# EAGLE board TapuinoMini (EAGLE 7.6.0)
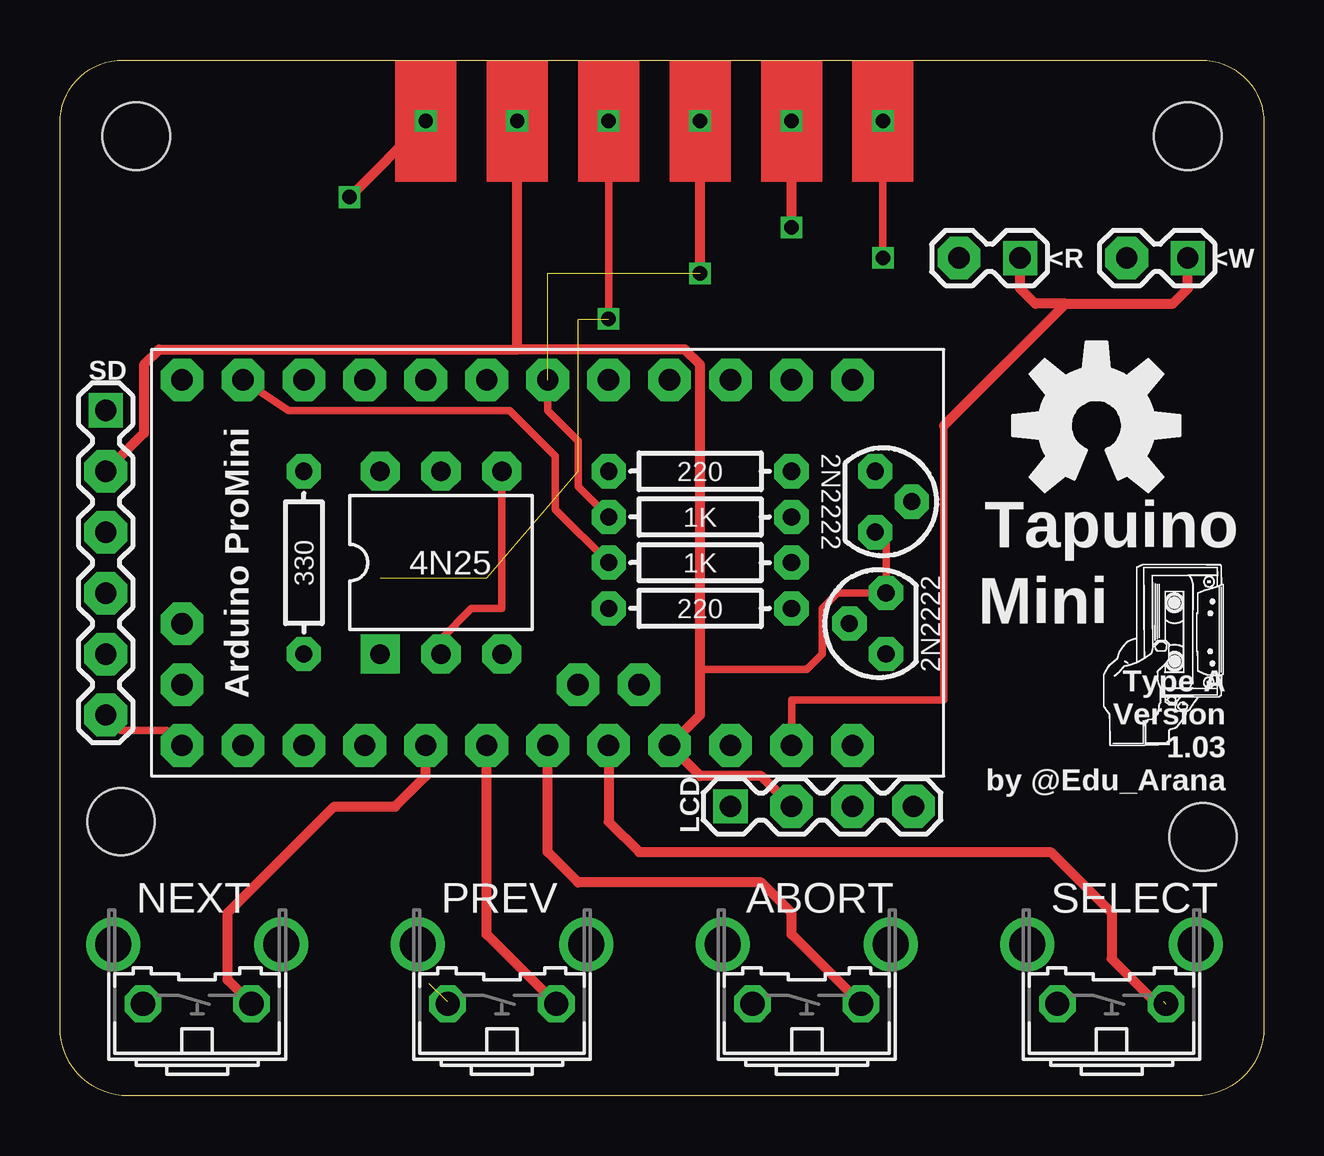
[diagram p0: board, top side]
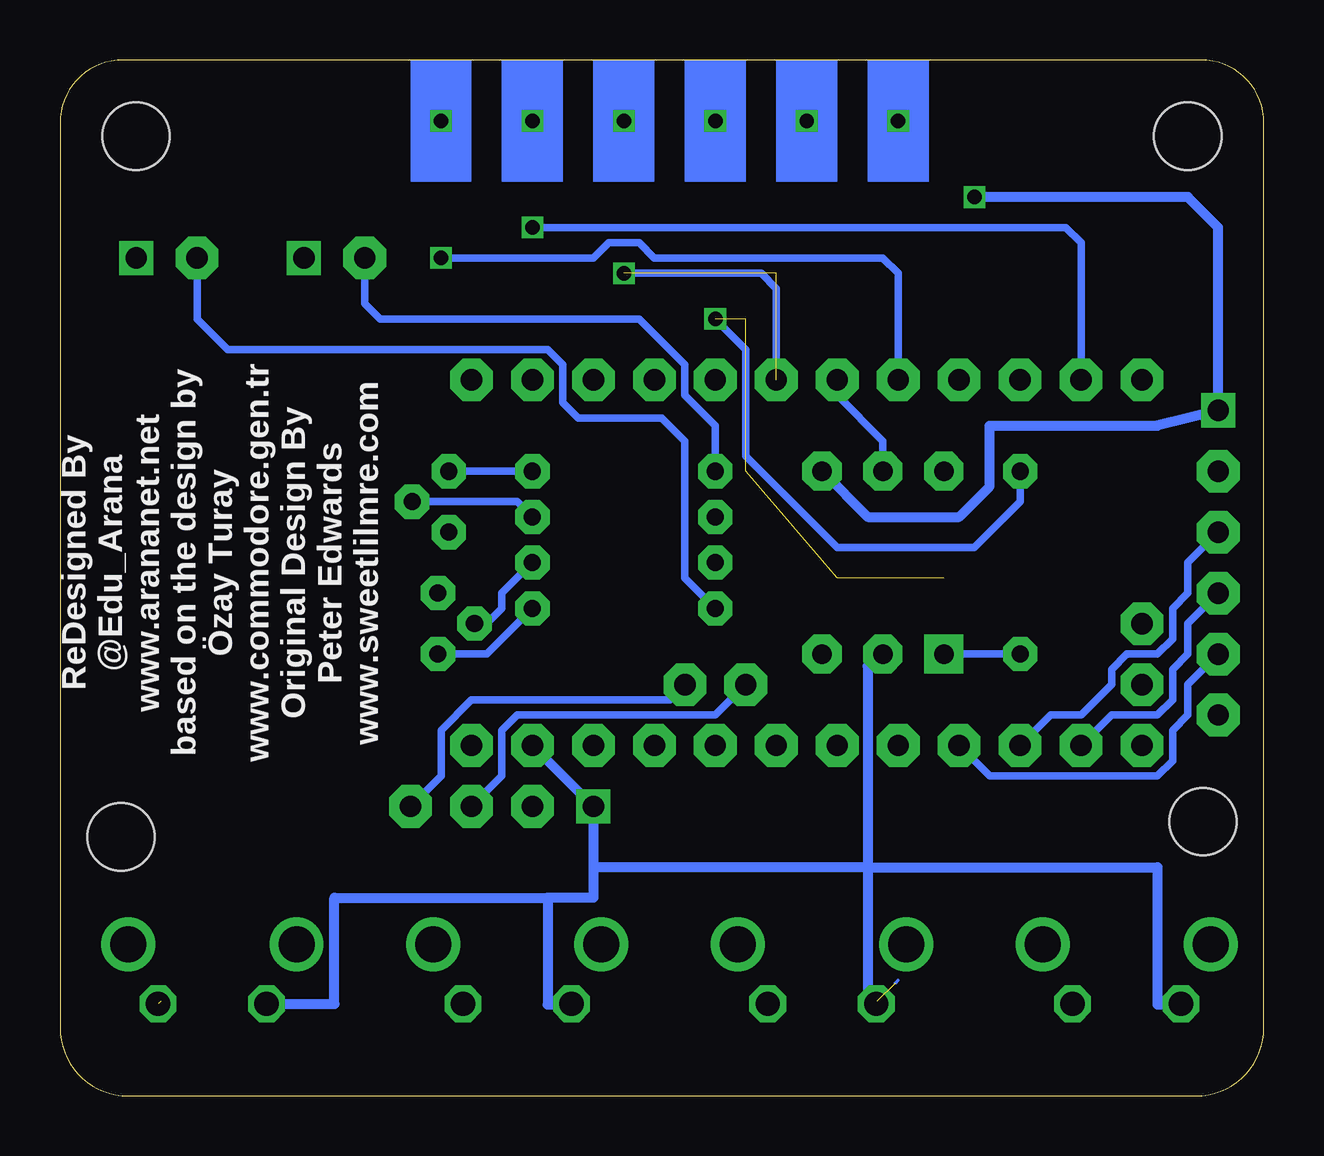
[diagram p1: board, bottom side, seen from below]

Size 50.16 x 43.18 mm. Coordinates in mm from the lower left corner, seen from the top.
Outline: 50.16,40.56 50.16,2.84 arc-90 47.33,0 2.84,0 arc-90 0,2.84 0,40.56 arc-90 2.62,43.18 47.55,43.18 arc-90 50.16,40.56
Copper layers (1*16): Top 0.035mm / dielectric 1.5mm / Bottom 0.035mm
Design rules "DirtyPCBs": minimum track width 5mil, minimum drill 12mil, track to track 5mil, track to pad 5mil, pad to pad 5mil, via to via 5mil, smd to smd 0mil, copper to edge 10mil, drill to drill 10mil, minimum pad ring 10mil, minimum via ring 6mil, stop-mask expansion 2mil, vias tented up to drill 25mil, thermal gap 10mil
Holes 2.8 mm at 3.17,40 46.99,40 47.62,10.79 2.54,11.43

## Footprints (pad centres in the part's own frame; a part is rotated, then mirrored left to right if it is on the bottom)
B3F-31XX = drill 1.016 octagon: 1 -2.261,-1.245; 2 2.261,-1.245 | drill 1.499 pad 2.159: 3 -3.505,1.245; 4 3.505,1.245
PROMINI_A = drill 0.889 pad 1.778 octagon: 0/RX 10.16,7.62; 1/TX 12.7,7.62; 2 2.54,7.62; 3* 0,7.62; 4 -2.54,7.62; 5* -5.08,7.62; 6* -7.62,7.62; 7 -10.16,7.62; 8 -12.7,7.62; 9* -15.24,7.62; 10* -15.24,-7.62; 11* -12.7,-7.62; 12 -10.16,-7.62; 13 -7.62,-7.62; A0 -5.08,-7.62; A1 -2.54,-7.62; A2 0,-7.62; A3 2.54,-7.62; A4 1.27,-5.08; A5 3.81,-5.08; A6 -15.24,-2.54; A7 -15.24,-5.08; GND@1 10.16,-7.62; GND@2 5.08,7.62; RAW 12.7,-7.62; RST@1 7.62,-7.62; RST@2 7.62,7.62; VCC 5.08,-7.62
1X04_SQR = drill 0.889 pad 1.422 square: 1 0,0 | drill 0.889 pad 1.778 octagon: 2 2.54,0; 3 5.08,0; 4 7.62,0
1X06_SQR = drill 0.889 pad 1.422 square: 1 0,0 | drill 0.889 pad 1.778 octagon: 2 2.54,0; 3 5.08,0; 4 7.62,0; 5 10.16,0; 6 12.7,0
1X02_SQR = drill 0.889 pad 1.422 square: 1 0,0 | drill 0.889 pad 1.778 octagon: 2 2.54,0
DIP06 = drill 0.813 pad 1.626 square: 1 -2.54,-3.81 | drill 0.813 pad 1.626 octagon: 2 0,-3.81; 3 2.54,-3.81; 4 2.54,3.81; 5 0,3.81; 6 -2.54,3.81
TO-92 = drill 0.711 pad 1.422 octagon: 1 -1.27,-0.635; 2 0,0.889; 3 1.27,-0.635
RESISTOR_PTH_0.3 = drill 0.711 pad 1.422 octagon: 1 -3.81,0; 2 3.81,0

## Placement (x,y rotation side)
ABORT  [B3F-31XX]  31.11,5.08 0 top
IC1  Arduino ProMini  [PROMINI_A]  20.32,22.23 0 top
JP1  LCD  [1X04_SQR]  27.94,12.06 0 top
JP2  SD  [1X06_SQR]  1.91,28.57 270 top
JP5  <R  [1X02_SQR]  40.01,34.92 180 top
JP6  <W  [1X02_SQR]  46.99,34.92 180 top
LOGO1  OSHW-LOGOL  [OSHW-LOGO-L]  43.18,27.94 0 top
NEXT  [B3F-31XX]  5.71,5.08 0 top
OK1  4N25  [DIP06]  15.88,22.23 0 top
PREV  [B3F-31XX]  18.41,5.08 0 top
Q1  2N2222  [TO-92]  34.61,24.77 270 top
Q2  2N2222  [TO-92]  33.78,19.69 90 top
R1  1K  [RESISTOR_PTH_0.3]  26.67,24.13 0 top
R2  1K  [RESISTOR_PTH_0.3]  26.67,22.23 0 top
R3  220  [RESISTOR_PTH_0.3]  26.67,26.04 180 top
R4  220  [RESISTOR_PTH_0.3]  26.67,20.32 180 top
R5  330  [RESISTOR_PTH_0.3]  10.16,22.23 270 top
SELECT  [B3F-31XX]  43.81,5.08 0 top

## Library data of the parts
ABORT NEXT PREV SELECT = switch-omron; MPN: B3F-3100; OC_FARNELL: 959704; OC_NEWARK: 36M3582
IC1 = sj_arduino
JP1 JP2 JP5 JP6 = sj_connectors
LOGO1 = sj_temp
OK1 Q1 Q2 R1-R5 = sj_standart

## Nets
CS: IC1.10* JP2.6
MISO: IC1.12 JP2.3
MOSI: IC1.11* JP2.4
MOTOR2: OK1.1 R5.2
MOTOR3: IC1.4 OK1.5
N$2: ABORT.2 IC1.A2
N$3: ABORT.1 IC1.GND@1 JP1.1 JP2.1 JP5.1 JP6.1 NEXT.1 OK1.2 OK1.4 PREV.1 SELECT.1
N$4: IC1.VCC JP1.2 JP2.2 Q1.3 Q2.3
N$5: R5.1
NEXT: IC1.A0 NEXT.2
PREV: IC1.A1 PREV.2
READ1: IC1.3* R1.1
READ2: Q1.2 R1.2
READ3: Q1.1 R3.1
READ4: JP5.2 R3.2
S$1: IC1.5*
S$2: IC1.A3
SCK: IC1.13 JP2.5
SCL: IC1.A5 JP1.4
SDA: IC1.A4 JP1.3
SELECT: SELECT.2
WRITE1: IC1.8 R2.1
WRITE2: Q2.2 R2.2
WRITE3: Q2.1 R4.1
WRITE4: JP6.2 R4.2

## Tracks (layer width: path | path; a pad name or v marks a point on that pad's centre or on a via)
CS
  Top 0.305: JP2.6 2.54,15.24 4.45,15.24 IC1.10*
MISO
  Bottom 0.305: JP2.3 3.17,22.23 3.17,20.95 3.81,20.32 3.81,19.05 4.45,18.41 5.71,18.41 6.35,17.78 6.35,17.14 7.62,15.88 8.89,15.88 IC1.12
MOSI
  Bottom 0.305: JP2.4 3.17,19.69 3.17,18.41 3.81,17.78 3.81,16.51 4.45,15.88 6.35,15.88 IC1.11*
MOTOR2
  Bottom 0.305: R5.2 OK1.1
MOTOR3
  Bottom 0.305: OK1.5 15.88,27.3 17.78,29.21 IC1.4
N$2
  Top 0.406: ABORT.2 30.48,6.73 30.48,7.62 29.21,8.89 21.59,8.89 20.32,10.16 IC1.A2
N$3  (via drill 0.6)  (1 unrouted)
  Top 0.305: 36.83,27.94 36.83,16.51 30.48,16.51 IC1.GND@1 | OK1.2 15.88,19.05 17.14,20.32 18.41,20.32 OK1.4
  Top 0.406: v12.06,37.47 v15.24,40.64 | 36.83,27.94 41.91,33.02 | 41.91,33.02 46.35,33.02 46.99,33.66 JP6.1 | 41.91,33.02 40.64,33.02 40.01,33.66 JP5.1
  Bottom 0.127: 15.37,4.7 15.24,4.83 | 3.56,3.94 NEXT.1 | 16.13,3.94 PREV.1
  Bottom 0.305: OK1.2 16.38,17.91
  Bottom 0.406: 16.38,17.91 16.51,17.91 16.51,9.53 | 16.51,9.53 4.45,9.53 4.45,3.81 3.45,3.81 NEXT.1 | 16.51,9.53 16.51,3.81 16.15,3.81 PREV.1 | IC1.GND@1 JP1.1 27.94,9.53 | SELECT.1 38.73,3.83 38.73,8.25 29.84,8.25 | 27.94,9.53 27.94,8.25 29.84,8.25 | 29.84,8.25 29.84,3.81 28.85,3.81 ABORT.1 | 16.51,9.53 27.94,9.53 | OK1.4 16.51,24.13 12.7,24.13 11.43,25.4 11.43,27.94 4.45,27.94 JP2.1 1.91,36.2 3.17,37.47 v12.06,37.47
N$4  (via drill 0.6)
  Top 0.305: 26.67,17.78 31.11,17.78 31.75,18.41 31.75,20.32 32.38,20.95 Q2.3 34.42,23.49 Q1.3
  Top 0.406: JP1.2 29.21,13.33 26.67,13.33 IC1.VCC 26.67,15.88 26.67,17.78 26.67,30.48 26.04,31.11 19.05,31.11 | 19.05,31.11 4.13,31.11 3.49,30.48 3.49,27.62 JP2.2 | 19.05,31.11 v19.05,40.64
N$5  (via drill 0.6)  (4 unrouted)
  Top 0: 10.16,25.4 R5.1
  Top 0.305: v22.86,32.38 v22.86,40.64
  Bottom 0.305: R5.1 10.16,24.77 12.06,22.86 17.78,22.86 21.59,26.67 21.59,31.11 v22.86,32.38
NEXT
  Top 0.127: 7.87,3.94 NEXT.2
  Top 0.406: 7.87,3.94 6.99,4.83 6.99,7.62 11.43,12.06 13.97,12.06 15.24,13.33 IC1.A0
PREV
  Top 0.127: 20.57,3.94 PREV.2
  Top 0.406: 20.57,3.94 17.78,6.73 IC1.A1
READ1  (via drill 0.6)  (2 unrouted)
  Top 0.305: IC1.3* 20.32,28.57 21.59,27.3 21.59,25.4 R1.1
  Top 0.406: v26.67,34.29 v26.67,40.64
  Bottom 0.305: IC1.3* 20.32,33.66 20.95,34.29 v26.67,34.29
READ2
  Bottom 0.305: R1.2 31.11,24.77 Q1.2
READ3
  Bottom 0.305: R3.1 Q1.1
READ4
  Bottom 0.305: R3.2 22.86,27.94 24.13,29.21 24.13,30.48 26.04,32.38 36.83,32.38 37.47,33.02 JP5.2
S$1  (via drill 0.6)
  Top 0.305: v34.29,34.92 v34.29,40.64
  Bottom 0.305: IC1.5* 15.24,34.29 15.88,34.92 25.4,34.92 26.04,35.56 27.3,35.56 27.94,34.92 v34.29,34.92
S$2
  Top 0.406: IC1.A3 22.86,11.43 24.13,10.16 41.27,10.16 43.81,7.62 43.81,5.71 45.72,3.81 46.35,3.81
SCK
  Bottom 0.305: JP2.5 3.17,17.14 3.17,15.88 3.81,15.24 3.81,13.97 4.45,13.33 11.43,13.33 IC1.13
SCL
  Bottom 0.305: IC1.A5 24.77,16.51 33.02,16.51 34.29,15.24 34.29,13.33 JP1.4
SDA
  Bottom 0.305: IC1.A4 22.86,15.88 31.11,15.88 31.75,15.24 31.75,13.33 JP1.3
SELECT  (1 unrouted)
WRITE1  (via drill 0.6)
  Top 0.305: R2.1 20.64,24.45 20.64,26.67 18.73,28.57 9.53,28.57 IC1.8
  Top 0.406: v30.48,36.2 v30.48,40.64
  Bottom 0.305: IC1.8 7.62,35.56 8.26,36.2 v30.48,36.2
WRITE2
  Bottom 0.305: R2.2 31.75,20.95 31.75,20.32 32.38,19.69 Q2.2
WRITE3
  Bottom 0.305: R4.1 32.38,18.41 Q2.1
WRITE4
  Bottom 0.305: R4.2 24.13,21.59 24.13,27.3 25.08,28.26 28.57,28.26 29.21,28.89 29.21,30.48 29.84,31.11 43.18,31.11 44.45,32.38 JP6.2
(copper drawn outside any net)
  shapes: Bottom area x6, Top area x11

## Text on the board
tPlace: Tapuino | Mini | Type A / Version / 1.03 / by @Edu_Arana
bPlace: ReDesigned By / @Edu_Arana / www.arananet.net / based on the design by / Özay Turay / www.commodore.gen.tr / Original Design By / Peter Edwards / www.sweetlilmre.com